# Altium PCB Ate_RF_Board.PcbDoc
Units mm, origin at the board's own origin, x right, y up, seen from the top; angles counter-clockwise.
Board outline 20.75 x 13.4 mm, 4 copper layers (Top Layer, Layer 1, Layer 2, Bottom Layer 1), stack 0.775 mm thick; 16 components, 16 nets, 51 pads, 58 vias.
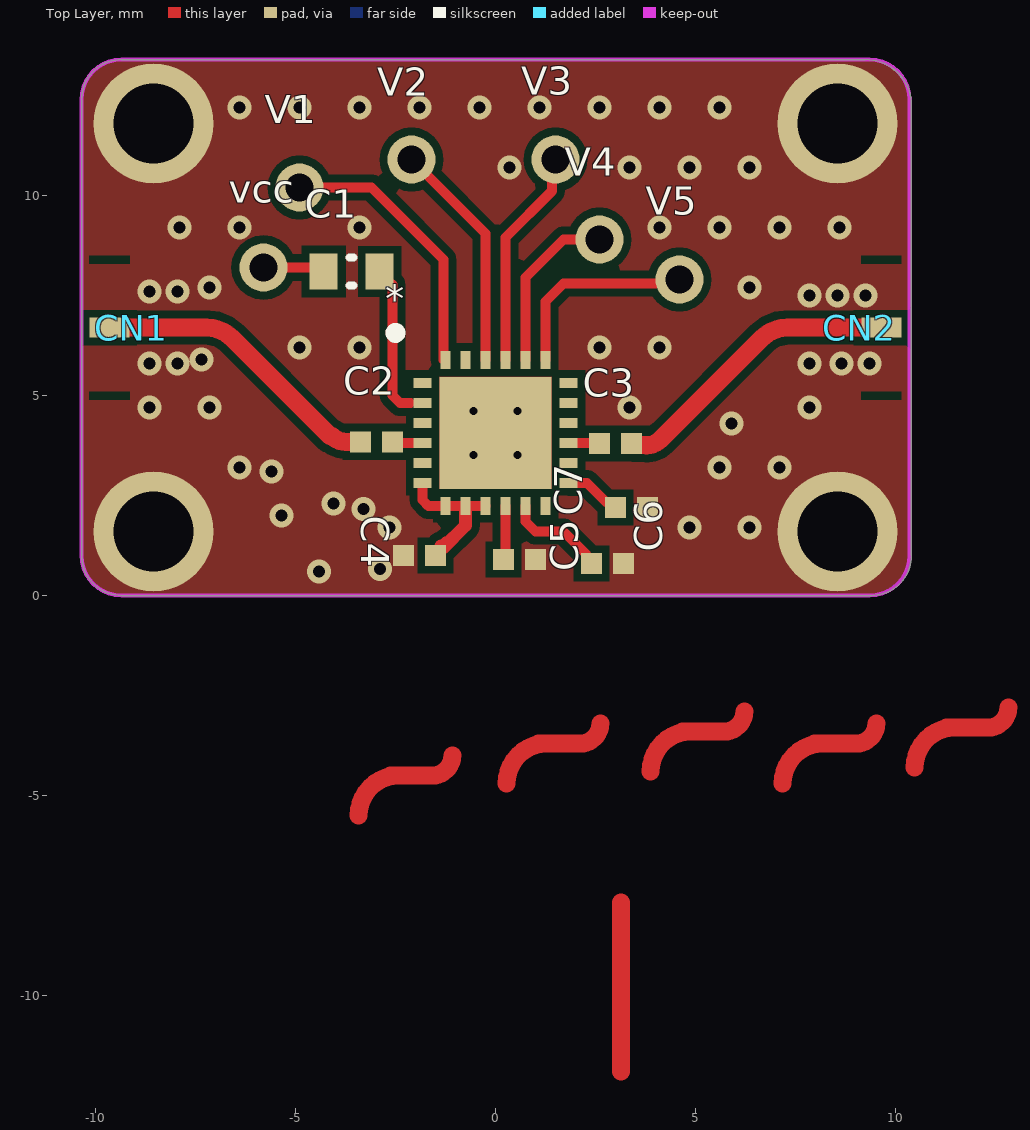
[diagram p0: Top Layer view]
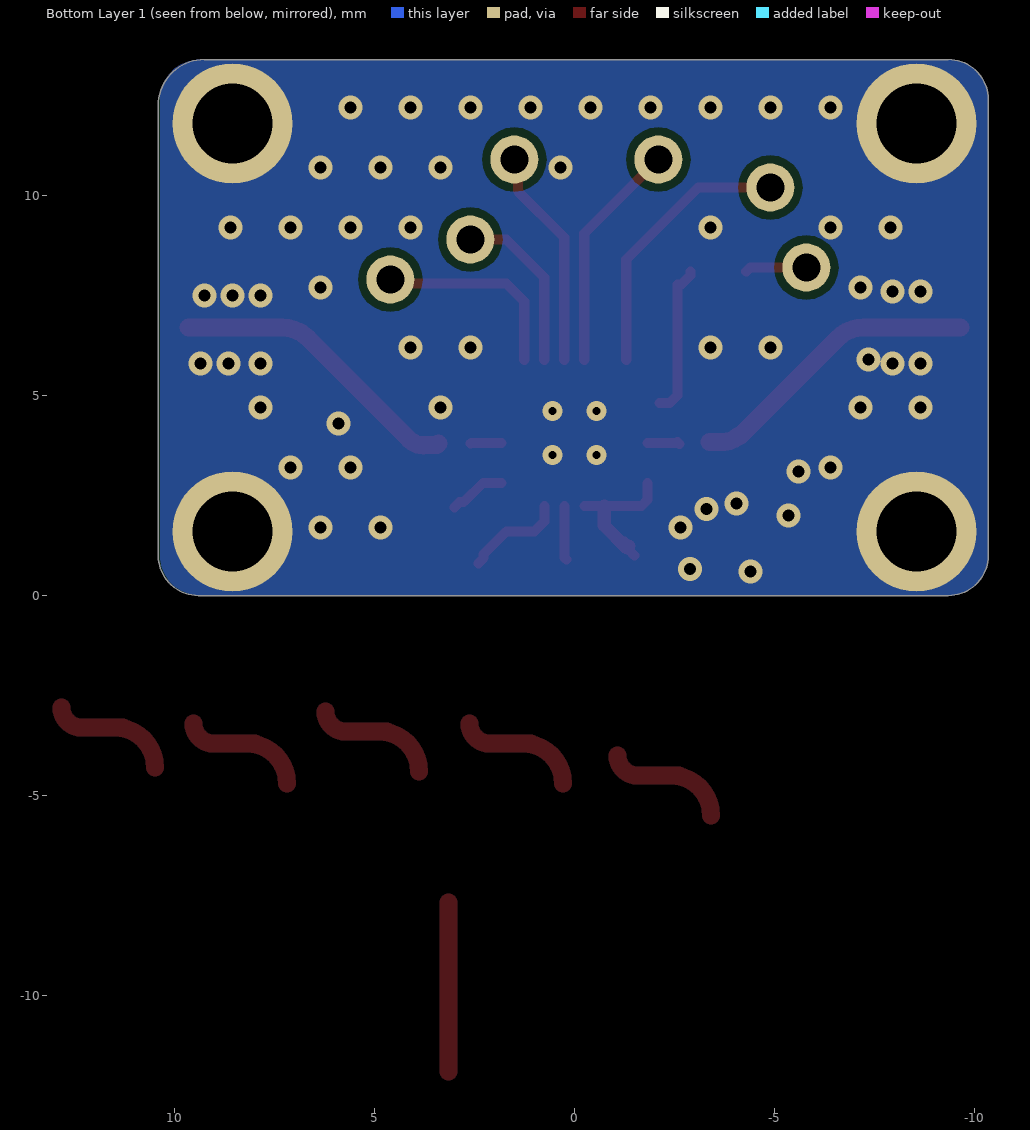
[diagram p1: Bottom Layer 1 view, seen from below]
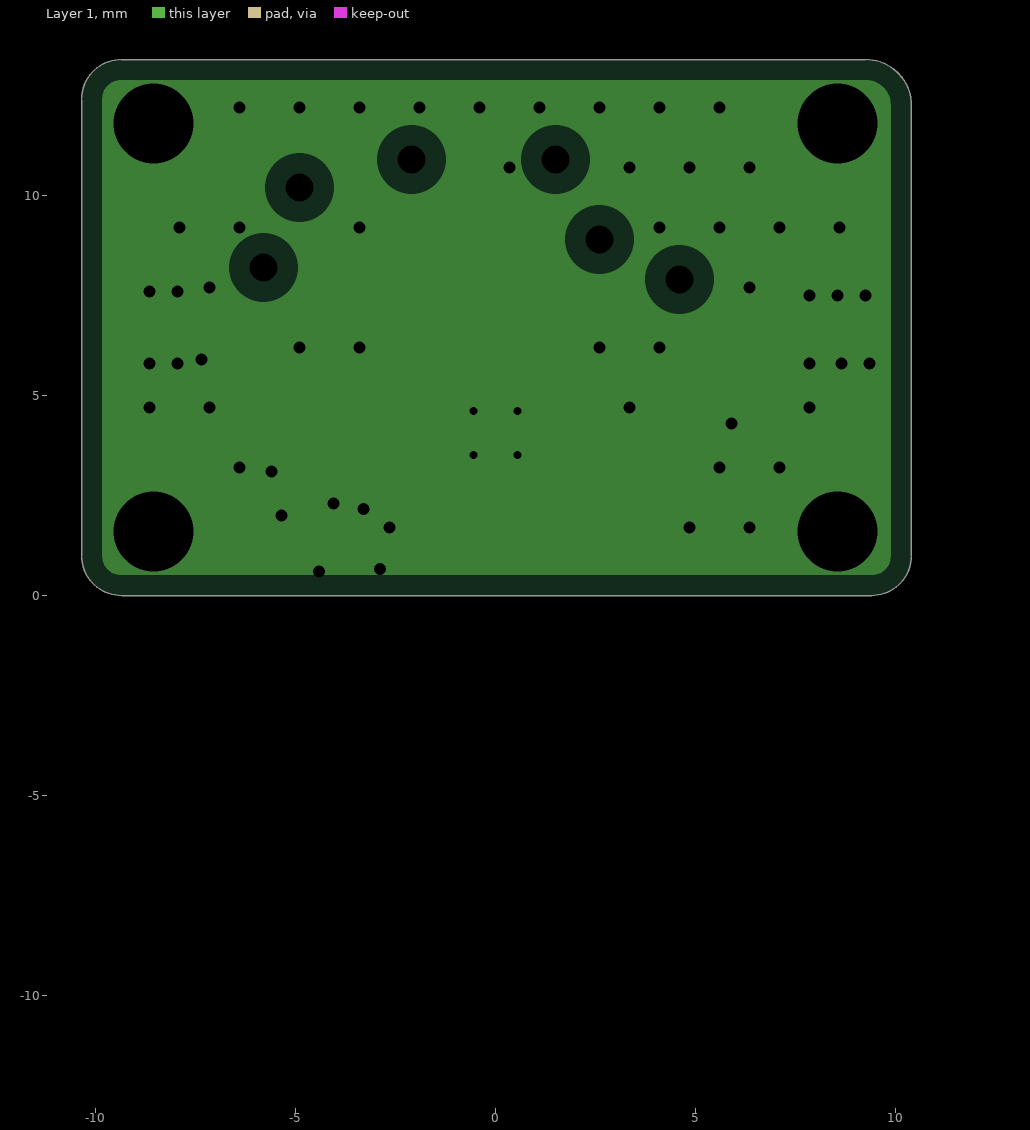
[diagram p2: Layer 1, clearances drawn from the general rule]
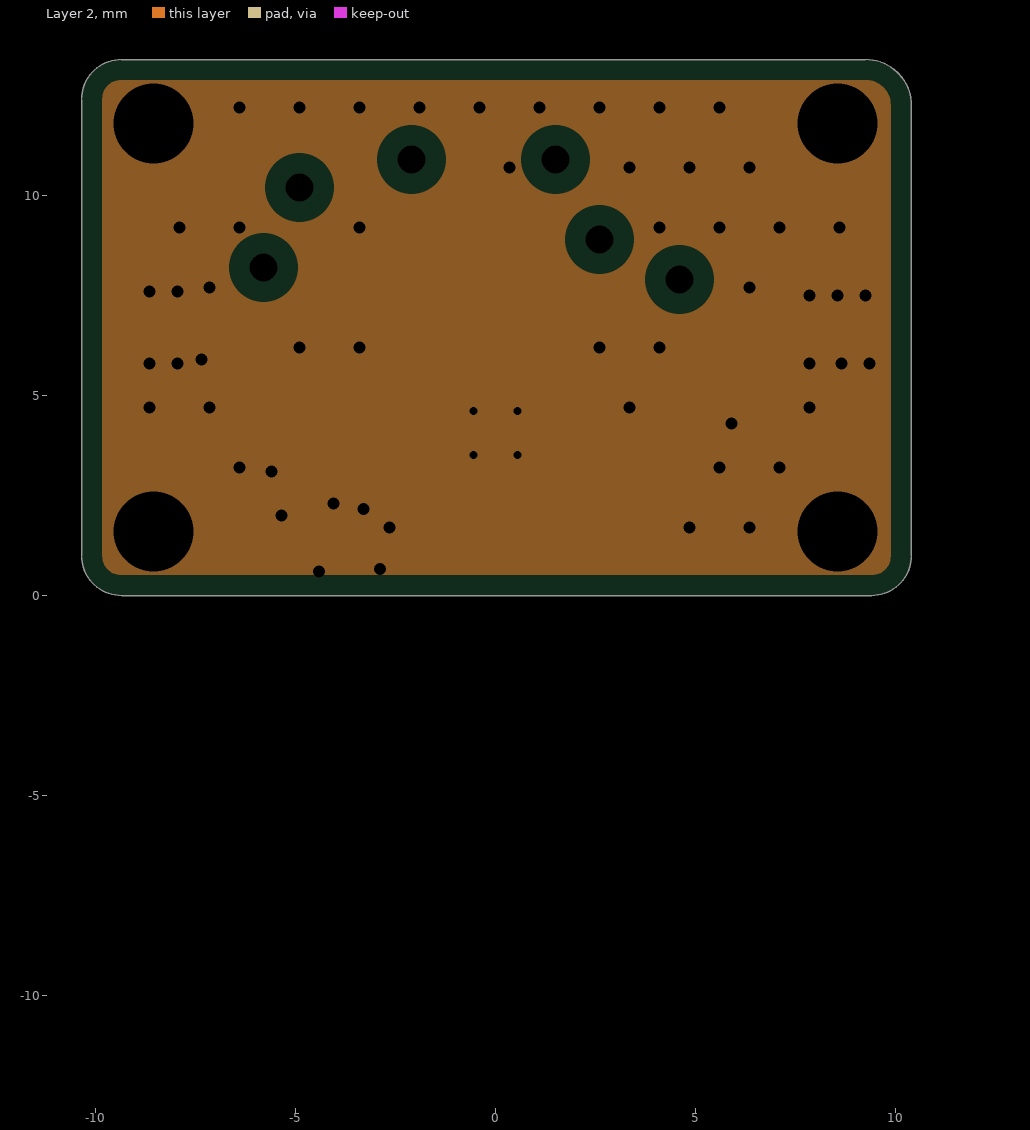
[diagram p3: Layer 2, clearances drawn from the general rule]

## Layer stack, top to bottom
Top Solder: solder mask 0.0102, Solder Resist, Dk 3.5
Top Layer: signal copper 0.035
Dielectric 2: prepreg 0.254, PP-006, Dk 4.1
Layer 1: plane copper 0.035, net GND
Dielectric 1: dielectric 0.127, FR-4, Dk 4.8
Layer 2: plane copper 0.035, net GND
Dielectric 3: prepreg 0.254, PP-006, Dk 4.1
Bottom Layer 1: signal copper 0.035
Bottom Solder: solder mask 0.0102, Solder Resist, Dk 3.5

## Board outline
-10.35,1 -10.35,12.4 cw(c-9.35,12.4) -9.35,13.4 9.25,13.4 cw(c9.25,12.25) 10.4,12.25 10.4,1 cw(c9.4,1) 9.4,0 -9.35,0 cw(c-9.35,1)

## Design rules (kind name [scope] priority, off if disabled: settings)
Clearance [All] p1: gap=0.2 ignorepadtopadclearanceinfootprint=FALSE
HoleSize [All] p1: absolutevalues=TRUE maxlimit=5 minlimit=0.3 maxpercent=80.000 minpercent=20.000
PlaneClearance [All] p1: clearance=0.508
PlaneConnect [All] p1: planeconnectstyle=Direct reliefexpansion=0.508 reliefentries=4 reliefconductorwidth=0.254 reliefairgap=0.254
PolygonConnect [All] p1: connectstyle=Direct reliefconductorwidth=0.254 reliefentries=4 polygonreliefangle="90 Angle" airgapwidth=0.254
RoutingVias [All] p1: holewidth=0.711 width=1.27 viastyle="Through Hole" minholewidth=0.711 minwidth=1.27 maxholewidth=0.711 maxwidth=1.27 useviatemplates=TRUE viatemplateguid#1={BD3C178C-7117-4FDC-B507-3BBC7E97FFC3} viatemplatename#1=v60h30m0mx0
SolderMaskExpansion [All] p1: expansion=0.102
Width Width_50ohm [InNetClass('50ohm')] p1: maxlimit=0.45 minlimit=0.45 preferedwidth=0.45 impedanceprofiledriven=TRUE impedanceprofileid={D2B77361-9B7D-4BD5-B69E-70E315500705} impedanceprofilevalue=50.000000 minimp=50.000000 maximp=50.000000 favimp=50.000000 checkconnectedcopper=TRUE
Width [All] p2: maxlimit=5 minlimit=0.2 preferedwidth=0.2
27 further rules are at their usual default settings.

## Classes and differential pairs
net class 50ohm: NetC3_1

## Components (designator, comment, footprint, x,y, rotation, side; value= is the part's Value field where it differs from the comment)
* "HMC542BLP4E" QFN50P400X400X80_HS-25N 0,4.065 r0 top
C1 "1000pF" CAPC0603(1608)55_L -3.6,8.1 r0 top value=1000p
C2 "1nF" 0402-CAP -2.975,3.84 r180 top value=1n
C3 "1nF" 0402-CAP 3,3.8 r180 top value=1n
C4 "470pF" 0402-CAP -1.9,1 r180 top
C5 "470pF" 0402-CAP 0.6,0.9 r0 top
C6 "470pF" 0402-CAP 2.8,0.8 r0 top
C7 "470pF" 0402-CAP 3.4,2.2 r0 top
CN1 "X-CONNECTOR" X-CONNECTOR-PCB -8.55,11.8 r0 top
CN2 "X-CONNECTOR" X-CONNECTOR-PCB 8.55,1.6 r180 top
V1 "TEST_VIA_RF" "New footprint 1" -4.9,10.2 r0 top
V2 "TEST_VIA_RF" "New footprint 1" -2.1,10.9 r0 top
V3 "TEST_VIA_RF" "New footprint 1" 1.5,10.9 r0 top
V4 "TEST_VIA_RF" "New footprint 1" 2.6,8.9 r0 top
V5 "TEST_VIA_RF" "New footprint 1" 4.6,7.9 r0 top
vcc "TEST_VIA_RF" "New footprint 1" -5.8,8.2 r90 top (schematic designator VCC)

## Footprints (in the part's own frame and the unit in brackets; to place one, negate y for a bottom-side part, rotate by r counter-clockwise, add the part's x,y. Pads: shape width x height; smd on the part's side, far side on the other; paste and mask are expansions set on the pad)
0402-CAP [mm] "Chip Capacitor, Body 1.0x0.5mm, Height 0.6mm, IPC Medium Density"
  rect 0.52x0.52 smd: 1(-0.4,0) 2(0.4,0)
  body extent -0.55,-0.3 0.55,0.3, height 0.33
CAPC0603(1608)55_L [mm] "Chip Capacitor, Body 1.6x0.8mm, Height 0.55mm, IPC High Density"
  rect 0.7x0.9 smd: 1(-0.7,0) 2(0.7,0)
  silkscreen extent -0.05,-0.35 0.05,0.35, body extent -0.87,-0.47 0.88,0.48, height 0.55
"New footprint 1" [mm]
  round 1.2 hole 0.7: 1(0,0)
QFN50P400X400X80_HS-25N [mm] "QFN, 24-Leads, Body 4,00x4,00mm, Pitch 0,50mm, Thermal Pad 2,80x2,80mm, IPC Medium Density"
  rect 0.45x0.25 smd: 1(-1.825,1.25) 2(-1.825,0.75) 3(-1.825,0.25) 4(-1.825,-0.25) 5(-1.825,-0.75) 6(-1.825,-1.25) 13(1.825,-1.25) 14(1.825,-0.75) 15(1.825,-0.25) 16(1.825,0.25) 17(1.825,0.75) 18(1.825,1.25)
  rect 0.25x0.45 smd: 7(-1.25,-1.825) 8(-0.75,-1.825) 9(-0.25,-1.825) 10(0.25,-1.825) 11(0.75,-1.825) 12(1.25,-1.825) 19(1.25,1.825) 20(0.75,1.825) 21(0.25,1.825) 22(-0.25,1.825) 23(-0.75,1.825) 24(-1.25,1.825)
  rect 2.8x2.8 smd: 25(0,0)
  silkscreen extent -2.62,2.38 -2.37,2.62, body extent -2.05,-2.05 2.05,2.05, height 0.8
X-CONNECTOR-PCB [mm]
  rect 1x0.5 smd: 1(-1.1,-5.1)
  round 3 hole 2: M1(0,0) M2(0,-10.2)
  Top Layer pour cut-out: -1.616,-3.576
  Top Layer pour cut-out: -1.6,-3.5 -0.6,-3.5 -0.6,-3.3 -1.6,-3.3
  Top Layer pour cut-out: -0.6,-6.7 -1.6,-6.7 -1.6,-6.9 -0.6,-6.9

## Part data
*: library part HMC542BLP4E-01.A.1, "Attenuators DATT, 0.5 dB LSB 6 Bit (Hitt Controller)", Attenuation Value=31.5dB, Case/Package=QFN, Max Frequency=4GHz, Max Operating Temperature=85°C, Max Power Dissipation=560mW, Max Supply Voltage=5.5V, Min Operating Temperature=-40°C, Min Supply Voltage=4.5V, Operating Supply Voltage=5V, Package Quantity=50, Contact Plating=Tin,Matte, Impedance=50R, Insertion Loss=1.9dB, Lead Free="Contains Lead", Mount="Surface Mount", Number of Bits=6, Number of Channels=1, Number of Pins=24, Packaging="Cut Tape", REACH SVHC="No SVHC", Weight=0.032741oz
C1: library part CC0603-1000pF-1, "CAP CER 1000PF 50V C0G/NP0 0603", Part No=GRM1885C1H102JA01D
C2 C3: library part CC0402-1nF-7, "CAP CER 1000pF 25V 10% X7R 0402", Part No=VJ0402Y562KNAAJ, Cod EMS=05.281.006.134
C4 C5 C6 C7: library part CC0402-470pF-1, "CAP CER 470PF 50V C0G/NP0 0402", Part No=GRM1555C1H471JA01D
CN1 CN2: library part X-CONNECTOR-5, "CONECTOR PARA MÓDULOS X MICROWAVE", Mount=TH, RoHS=Yes
V1 V2 V3 V4 V5 vcc: library part TEST_VIA_RF-01.A.1, "Test VIA for RF circuits"

## Via types
v1: diameter 0.6, hole 0.3, Top Layer to Bottom Layer 1, 36 vias
v2: diameter 0.6, hole 0.3, Top Layer to Bottom Layer 1, tented both sides, 18 vias
v3: diameter 0.5, hole 0.2, Top Layer to Bottom Layer 1, 4 vias

## Nets (pads, with @x,y where several pads share a name; then routed paths per layer and width w, separated by ;. In a path a pad name is that pad's centre, name@x,y a point inside that pad or via, vN(x,y) a via of type N, cw(c..) or ccw(c..) an arc to the next point about the centre after c; other vN are vias at no path point)
GND: *.25 C4.2 C5.2 C6.2 C7.2 CN1.M1 CN1.M2 CN2.M1 CN2.M2
  other v1: -2.65,1.7 4.85,1.7 6.35,1.7 -6.4,3.2 5.6,3.2 7.1,3.2 -8.65,4.7 -7.15,4.7 3.35,4.7 7.85,4.7 -4.9,6.2 -3.4,6.2 2.6,6.2 4.1,6.2 -7.15,7.7 6.35,7.7 -7.9,9.2 -6.4,9.2 -3.4,9.2 4.1,9.2 5.6,9.2 7.1,9.2 8.6,9.2 0.35,10.7 3.35,10.7 4.85,10.7 6.35,10.7 -6.4,12.2 -4.9,12.2 -3.4,12.2 -1.9,12.2 -0.4,12.2 1.1,12.2 2.6,12.2 4.1,12.2 5.6,12.2
  other v2: -4.41,0.596 -2.89,0.661 -5.35,2 -3.3,2.165 -4.05,2.3 -5.6,3.1 5.9,4.3 -8.65,5.8 -7.95,5.8 7.85,5.8 8.65,5.8 9.35,5.8 -7.35,5.9 7.85,7.5 8.55,7.5 9.25,7.5 -8.65,7.6 -7.95,7.6
  other v3: -0.55,3.515 0.55,3.515 -0.55,4.615 0.55,4.615
Net*_2: *.2 C1.2 | length 3.8
  Top Layer w0.25: C1.2 -2.9,8 -2.675,7.775 -2.575,7.775 -2.575,5.003 -2.387,4.815 -2.125,4.815
Net*_4: *.4 C2.1 | length 0.8
  Top Layer w0.25: C2.1@-2.625,3.79 C2.1 -2.55,3.815 *.4
Net*_6: *.6 *.7 *.8 *.9 C4.1 | length 3.8
  Top Layer w0.25: *.6 -1.825,2.387 -1.679,2.24 *.7 *.8 *.9 ; C4.1 C4.1@-1.365,1.135 ; C4.1@-1.365,1.235 -1.25,1.35
  Top Layer w0.33: C4.1@-1.365,1.235 -1.315,1.185 -0.75,1.75 *.8
Net*_10: *.10 C5.1 | length 1.4
  Top Layer w0.25: C5.1 0.25,0.95 *.10
Net*_11: *.11 C6.1 | length 2.5
  Top Layer w0.25: *.11 0.75,1.85 1,1.6 1.7,1.6 2.265,1.035 2.265,0.935 C6.1
Net*_13: *.13 C7.1 | length 1.4
  Top Layer w0.25: *.13 2.285,2.815 2.765,2.335 2.865,2.335 C7.1
Net*_15: *.15 C3.2 | length 0.8
  Top Layer w0.25: *.15 2.585,3.815 C3.2
Net*_19: *.19 V5.1 | length 4.4
  Top Layer w0.255: *.19 1.25,7.35 1.7,7.8 4,7.8
Net*_20: *.20 V4.1 | length 4.3
  Top Layer w0.255: *.20 0.75,7.95 1.7,8.9 V4.1
Net*_21: *.21 V3.1 | length 5.5
  Top Layer w0.255: *.21 0.25,8.95 1.41,10.11 1.41,10.81 V3.1
Net*_22: *.22 V2.1 | length 5.8
  Top Layer w0.255: V2.1 -0.25,9.05 *.22
Net*_24: *.24 V1.1 | length 7
  Top Layer w0.255: V1.1@-5,10.2 V1.1 -3.1,10.2 -1.3,8.4 *.24@-1.3,5.89
NetC2_2: C2.2 CN1.1 | length 7.8
  Top Layer w0.45: CN1.1 -7.227,6.7 cw(c-7.227,5.8) -6.59,6.436 -4.141,3.987 -4.094,3.987 ; C2.2 -3.74,3.84 ; -4.094,3.987 ccw(c-3.74,4.34) -3.74,3.84 ; -4.094,3.987 ccw(c-3.74,4.34) -3.74,3.84
NetC3_1: C3.1 CN2.1 | length 7.4
  Top Layer w0.45: C3.1 3.435,3.765 3.762,3.765 3.774,3.754 ccw(c3.774,4.254) 4.127,3.9 6.664,6.436 cw(c7.3,5.8) 7.3,6.7 CN2.1
VCC: C1.1 vcc.1 | length 1.5
  Top Layer w0.255: vcc.1 -4.4,8.2 C1.1
pads on no net: *.1 *.3 *.5 *.12 *.14 *.16 *.17 *.18 *.23
copper on no net: | length 21.2
  Top Layer w0.45: -3.42,-5.5 cw(c-2.42,-5.5) -2.42,-4.5 ; -2.62,-4.5 -1.58,-4.5 ccw(c-1.58,-4) -1.08,-4 ; 0.28,-4.7 cw(c1.28,-4.7) 1.28,-3.7 ; 1.08,-3.7 2.12,-3.7 ccw(c2.12,-3.2) 2.62,-3.2 ; 3.14,-11.9 3.14,-7.675 ; 3.88,-4.4 cw(c4.88,-4.4) 4.88,-3.4 ; 4.68,-3.4 5.72,-3.4 ccw(c5.72,-2.9) 6.22,-2.9 ; 7.18,-4.7 cw(c8.18,-4.7) 8.18,-3.7 ; 7.98,-3.7 9.02,-3.7 ccw(c9.02,-3.2) 9.52,-3.2 ; 10.48,-4.3 cw(c11.48,-4.3) 11.48,-3.3 ; 11.28,-3.3 12.32,-3.3 ccw(c12.32,-2.8) 12.82,-2.8

## Polygon pours and split planes (outlines as drawn)
GND on Bottom Layer 1 "Bottom Layer 1-GND" (solid, pour order 3): -9.35,0 cw(c-9.35,1) -10.35,1 -10.35,12.4 cw(c-9.35,12.4) -9.35,13.4 9.35,13.4 cw(c9.35,12.4) 10.35,12.4 10.35,1 cw(c9.351,0.999) 9.35,0
GND on Top Layer "Top Layer-GND" (solid, pour order 5): -9.35,0 cw(c-9.35,1) -10.35,1 -10.35,12.4 cw(c-9.35,12.4) -9.35,13.4 9.45,13.4 cw(c9.278,12.287) 10.39,12.46 10.39,1 cw(c9.122,1.268) 9.39,0
GND on Layer 1 (split plane): -9.35,12.89 9.25,12.89 9.261,12.891 9.35,12.884 9.448,12.86 9.541,12.822 9.627,12.769 9.704,12.704 9.769,12.627 9.822,12.541 9.86,12.448 9.884,12.35 9.891,12.261 9.89,12.25 9.89,1 9.891,0.988 9.882,0.904 9.854,0.812 9.809,0.727 9.748,0.652 9.673,0.591 9.588,0.546 9.496,0.518 9.412,0.509 9.4,0.51 -9.35,0.51 -9.362,0.509 -9.446,0.518 -9.538,0.546 -9.623,0.591 -9.698,0.652 -9.759,0.727 -9.804,0.812 -9.832,0.904 -9.841,0.988 -9.84,1 -9.84,12.4 -9.841,12.412 -9.832,12.496 -9.804,12.588 -9.759,12.673 -9.698,12.748 -9.623,12.809 -9.538,12.854 -9.446,12.882 -9.362,12.891
GND on Layer 2 (split plane): -9.35,12.89 9.25,12.89 9.261,12.891 9.35,12.884 9.448,12.86 9.541,12.822 9.627,12.769 9.704,12.704 9.769,12.627 9.822,12.541 9.86,12.448 9.884,12.35 9.891,12.261 9.89,12.25 9.89,1 9.891,0.988 9.882,0.904 9.854,0.812 9.809,0.727 9.748,0.652 9.673,0.591 9.588,0.546 9.496,0.518 9.412,0.509 9.4,0.51 -9.35,0.51 -9.362,0.509 -9.446,0.518 -9.538,0.546 -9.623,0.591 -9.698,0.652 -9.759,0.727 -9.804,0.812 -9.832,0.904 -9.841,0.988 -9.84,1 -9.84,12.4 -9.841,12.412 -9.832,12.496 -9.804,12.588 -9.759,12.673 -9.698,12.748 -9.623,12.809 -9.538,12.854 -9.446,12.882 -9.362,12.891

## Keep-outs
Top Layer:
  lines w0.1: -10.35,1 ccw(c-9.35,1) -9.35,0 9.35,0 ccw(c9.35,1) 10.35,1 10.35,12.4 ccw(c9.35,12.4) 9.35,13.4 -9.35,13.4 ccw(c-9.35,12.4) -10.35,12.4 -10.35,1

## Silkscreen, mask and mechanical layers (free items; w line width, h text height)
Mechanical 1:
  lines w0.2: -10.35,1 ccw(c-9.35,1) -9.35,0 9.35,0 ccw(c9.35,1) 10.35,1 10.35,12.4 ccw(c9.35,12.4) 9.35,13.4 -9.35,13.4 ccw(c-9.35,12.4) -10.35,12.4 -10.35,1